# Altium PCB PCB.PcbDoc (part 2 of 2)
Units mil, origin at the board's own origin, x right, y up, seen from the top; angles counter-clockwise.
Board outline 4230 x 2520 mil, 4 copper layers (Top Layer, Int1 (GND), Int2 (PWR), Bottom Layer), stack 62.45 mil thick; 113 components, 91 nets, 361 pads, 344 vias.
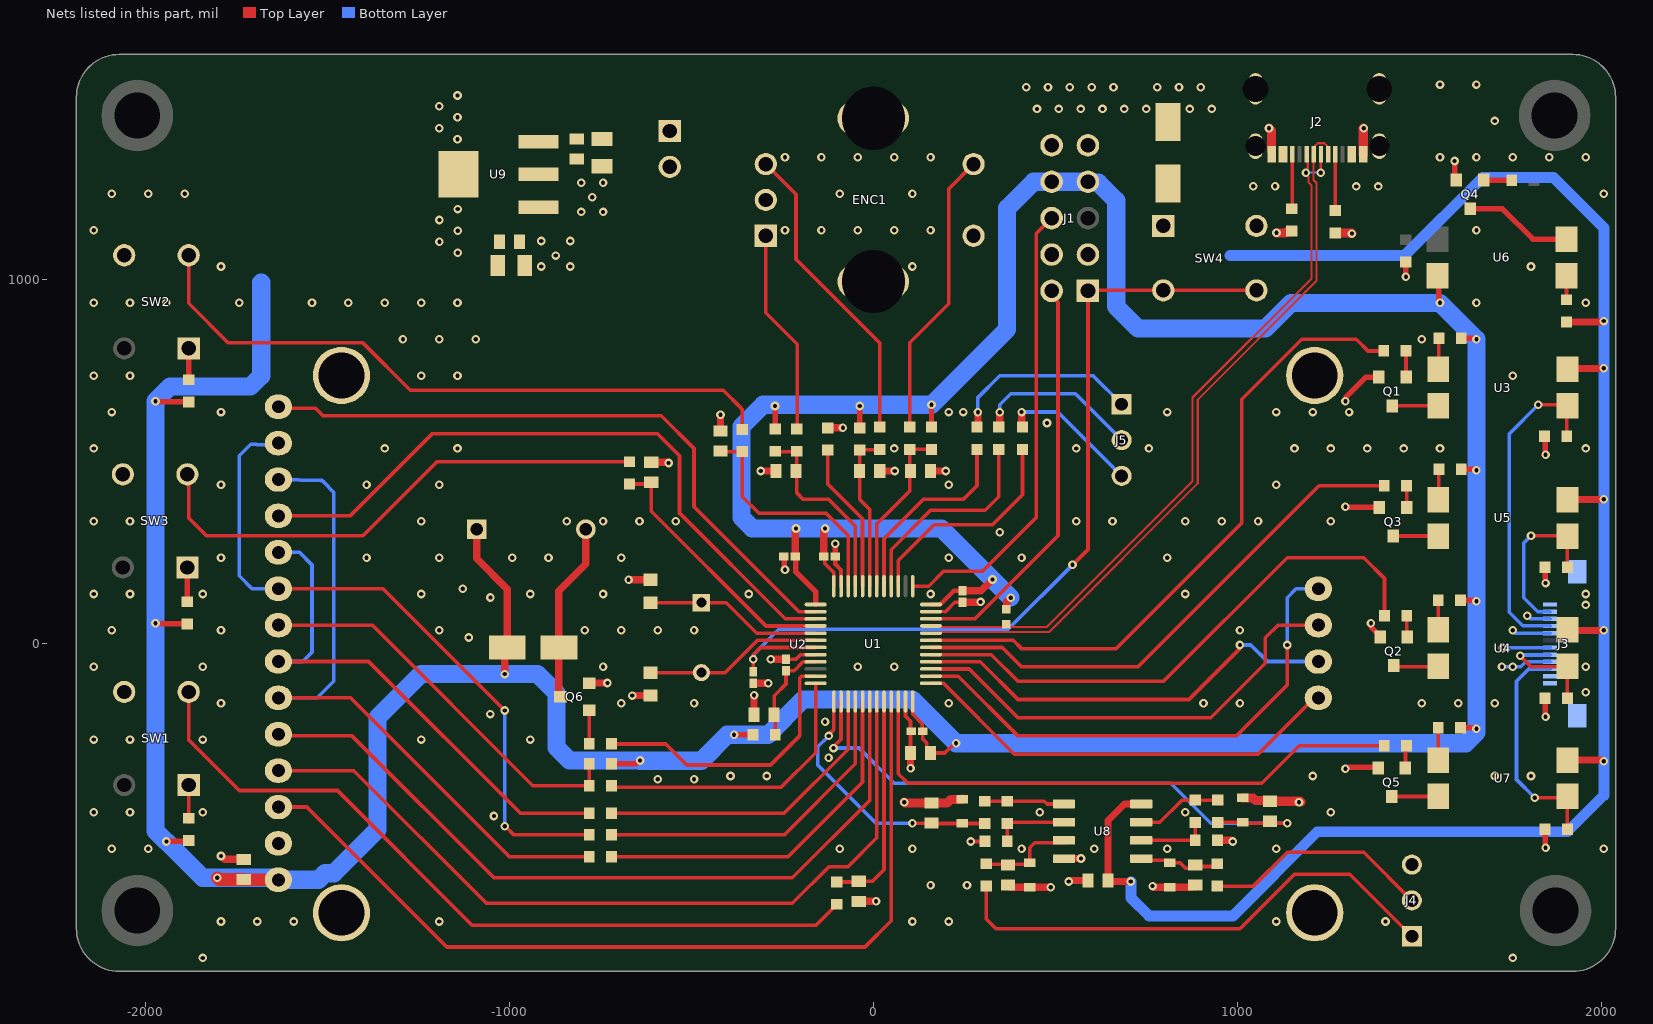
[diagram p4: the nets of this part, all layers, seen from the top]

## Via types
v1: diameter 23.62/23.62/23.62/23.62 (per signal layer), hole 11.81, Top Layer to Bottom Layer, tented both sides, 171 vias
v2: diameter 23.62, hole 11.81, Top Layer to Bottom Layer, tented both sides, 108 vias
v3: diameter 23.62, hole 11.81, Top Layer to Bottom Layer, 65 vias

## Nets (pads, with @x,y where several pads share a name; then routed paths per layer and width w, separated by ;. In a path a pad name is that pad's centre, name@x,y a point inside that pad or via, vN(x,y) a via of type N, cw(c..) or ccw(c..) an arc to the next point about the centre after c; other vN are vias at no path point) (continued)
3V3: C1.2 C2.2 C3.2 C4.2 C5.2 C11.2 C23.2 C24.2 D1.1 J1.7 J1.8 L1.1 R2.1 R3.1 R6.2 R10.2 R11.2 R14.2 R15.2 R19.2 R20.2 R21.2 R22.2 R30.2 R43.2 U1.1 U1.24 U1.36 U1.48 U2.1 U6.4 U9.2 U9.4 | length 13519.2
  Top Layer w10: C5.2@-135.81,240 -133,237.19 -133,220.03 -108.27,195.3 U1.48@-108.27,158.46 ; U1.24@108.27,-158.46 108.27,-193.76 134.54,-220.03 134.54,-238.72 C1.2@135.81,-240 135.81,-261.31 147.2,-272.7 147.2,-289.65 C2.2@160.53,-302.97 ; C2.2@157.56,-300 196.76,-300 223.79,-272.97 v2(227.47,-272.97)
  Top Layer w12: U1.36@158.46,108.27 183.9,108.27 221.44,145.81 C4.2@245,145.81
  Top Layer w15: v2(-1972.53,57.03) -1971.2,55.7 -1890.7,55.7 R11.2@-1887.65,52.65 ; v2(-1972.53,667.03) -1971.2,665.7 -1882.74,665.7 R10.2@-1881.42,664.38 ; v2(-1942.53,-542.97) -1941.35,-541.8 -1882.59,-541.8 R6.2@-1881.42,-540.62 ; R3.1@-719.38,-330 -652.61,-330 -643.18,-320.58 v2(-640.85,-320.58) ; v2(-382.53,-250) R2.1@-330.62,-250 ; R19.2@-270,589.87 v2@-270,650.62 ; v2@-214.19,315.37 v2(-212.53,317.03) ; C3.2@-212.53,241.94 -212.53,197.86 -158.46,143.8 U1.1@-158.46,108.27 ; v2@-135.81,311.41 -132.53,314.7 v2(-132.53,317.03) ; R14.2@-37.56,589.87 v2@-37.56,650.62 ; R15.2@160,593.31 v2@160,654.06 ; U6.4@1553.75,1007.03 1553.75,943.09 1557.47,939.36 v2(1557.47,937.03) ; R30.2@1613.75,-230 1652.17,-230 1655.14,-232.97 v2(1657.47,-232.97) ; R21.2@1613.75,120 1652.17,120 1655.14,117.03 v2(1657.47,117.03) ; R22.2@1613.75,480 1652.17,480 1655.14,477.03 v2(1657.47,477.03) ; R20.2@1615.62,840 1652.17,840 1655.14,837.03 v3(1657.47,837.03)
  Top Layer w20: L1.1@-1090,315 -1090,234.5 -1006,150.5 D1.1@-1006,-10 -1012.53,-16.53 v3(-1012.53,-82.97) ; C3.2@-214.19,240 v2@-214.19,315.37 ; C5.2@-135.81,240 v2@-135.81,311.41 ; C4.2@245.83,148.67 245.83,145.81 296.25,145.81 v2(327.47,177.03) ; R43.2@365,95 366.81,96.81 366.81,115.39 377.47,126.05 v2(377.47,127.03)
  Top Layer w35: v2(-1802.53,-642.97) -1797.82,-647.68 C11.2@-1730,-647.68 -1729.65,-648.03 -1635.22,-648.03 U2.1@-1634.87,-648.38
  Bottom Layer w50: v2(-1802.53,-642.97) -1842.53,-642.97 v2(-1942.53,-542.97) -1943.24,-542.97 -1972.53,-513.68 v2(-1972.53,57.03) v2(-1972.53,667.03) -1932.53,707.03 -1711.48,707.03 -1682.19,736.32 -1682.19,992.62 ; v2@-1798.92,-642.97 U2.1@-1634.87,-642.97 ; U2.1@-1634.87,-648.38 -1524.46,-648.38 -1506.38,-630.3 -1482.17,-630.3 -1362.53,-510.67 -1362.53,-202.97 -1242.53,-82.97 v3(-1012.53,-82.97) -922.53,-82.97 -870.76,-134.73 -870.76,-284.73 -834.92,-320.58 v2(-640.85,-320.58) ; v2@-640.26,-321.17 -472.7,-321.17 -401.53,-250 v2(-382.53,-250) -289.56,-250 -192.53,-152.97 107.47,-152.97 v2(227.47,-272.97) 1628.18,-272.97 1657.47,-243.68 v2(1657.47,-232.97) v2(1657.47,117.03) v2(1657.47,477.03) v3(1657.47,837.03) v2(1557.47,937.03) 1147.79,937.03 1077.79,867.03 727.47,867.03 667.47,927.03 667.47,1218.24 617.97,1267.74 592.26,1267.74 J1.7@590,1270 J1.8@490,1270 ; 147.47,657.03 -302.97,657.03 -362.53,597.47 -362.53,347.03 -332.53,317.03 v2(-212.53,317.03) v2(-132.53,317.03) 187.47,317.03 v2(327.47,177.03) v2(377.47,127.03) ; v2(160,657.03) 367.47,864.5 367.47,1197.03 440.33,1269.89 486.7,1269.89 J1.8@488.4,1271.6
  other v2: -270,653.59 -37.56,653.59 -1142.24,1074.88 -1192.24,1104.88 -1142.24,1134.88 -1192.24,1164.88 -1142.24,1194.88 -1142.53,1387.03 -1142.53,1447.03 -1192.53,1477.03 -1142.53,1507.03
  other v3: -1192.53,1417.03
3V3_VA: C6.2 C10.2 R2.2 U1.9 | length 282.7
  Top Layer w10: R2.2@-269.38,-250 -269.38,-198.06 C10.2@-272.44,-195 -272.44,-142.74 -240,-110.3 C6.2@-240,-73.6 -217.23,-73.6 -192.92,-49.29 -158.54,-49.29 U1.9@-158.46,-49.21
5V0: C22.2 C25.2 C26.2 D4.1 J1.9 J1.10 J6.1 R29.2 U3.4 U4.4 U5.4 U7.4 U8.8 U9.3 | length 5072.3
  Top Layer w10: U4.4@1907.43,38.53 U4.4@1908.93,37.03 ; U5.4@1907.43,396.37 U5.4@1908.1,397.03 ; U3.4@1907.43,754.2 U3.4@1910.26,757.03
  Top Layer w20: v2(707.47,-652.97) 648.09,-652.97 C22.2@645.12,-650 645.12,-485.32 690.44,-440 U8.8@736.3,-440 ; R29.2@1905,884.38 2003.84,884.38 2006.49,887.03 v2(2007.47,887.03) ; U7.4@1907.43,-319.31 v2@2003.82,-319.31 ; U5.4@1908.1,397.03 v2(2007.47,397.03) ; U4.4@1908.93,37.03 v2(2007.47,37.03) ; U3.4@1910.26,757.03 v2(2007.47,757.03)
  Bottom Layer w30: v2@708.21,-653.71 708.21,-698.09 758.21,-748.09 988.21,-748.09 1219.91,-516.38 1907.22,-516.38 2007.47,-416.13 v2(2007.47,-322.97) v2(2007.47,37.03) v2(2007.47,397.03) ; 979.88,1067.03 1459.92,1067.03 1674.8,1281.91 1868.92,1281.91 2008.21,1142.62 v2@2008.21,887.77 ; v2@2008.21,397.77 v2@2008.21,756.29 ; v2@2008.21,757.77 v2@2008.21,886.29
  other v3: 450,1470 510,1470 570,1470 630,1470 690,1470 750,1470 870,1470 930,1470 420,1530 480,1530 540,1530 600,1530 660,1530 780,1530 840,1530 900,1530
B1: C12.2 R8.2 U1.20 | length 605.8
  Top Layer w10: R8.2@-100,-654.38 -41.94,-654.38 C12.2@-40,-652.44 -2,-652.44 29.53,-620.91 U1.20@29.53,-158.46
B2: C13.2 R12.2 U1.46 | length 659
  Top Layer w10: C13.2@-420,529.93 -418.35,528.28 R12.2@-360,528.28 -360,404.5 -314.34,358.84 -130.08,358.84 -68.9,297.66 U1.46@-68.9,158.46
B3: C14.2 R13.2 U1.4 | length 723.5
  Top Layer w10: R13.2@-670,439.38 -614.61,439.38 C14.2@-610,443.99 -610,439.38 -610,364.5 -294.71,49.21 U1.4@-158.46,49.21
B4: C16.2 R15.1 R17.2 U1.42 | length 472.9
  Top Layer w10: U1.42@9.84,158.46 9.84,329.4 100.55,420.11 100.55,487.03 R17.2@100.55,534.38 R15.1@160,534.38
BLOWER: R25.2 U1.30 | length 1474.2
  Top Layer w10: U1.30@158.46,-9.84 354.35,-9.84 407.47,-62.97 727.47,-62.97 1225.11,434.67 1404.05,434.67 R25.2@1404.38,435
BLOWER_ISO: J3.2 R28.2 U5.3 | length 452.5
  Top Layer w10: v2(1807.47,297.03) U5.3@1907.43,297.03 ; R28.2@1907.43,210 U5.3@1907.43,296.37
  Bottom Layer w10: v2(1807.47,297.03) 1787.47,277.03 1787.47,127.03 1825.92,88.58 J3.2@1859.45,88.58
BUZZER: R7.2 U1.11 | length 779
  Top Layer w10: R7.2@-719.38,-275 -570.5,-275 -512.53,-332.97 -282.53,-332.97 -202.53,-252.97 -202.53,-94.44 -196.67,-88.58 U1.11@-158.46,-88.58
CH_A: C17.2 R18.2 R19.1 U1.45 | length 533
  Top Layer w10: R19.1@-263.88,528.28 -208.77,528.28 -209.91,527.13 -209.91,470.94 -209.91,414.42 -192.53,397.03 -122.53,397.03 -49.21,323.72 U1.45@-49.21,158.46
CH_B: C15.2 R14.1 R16.2 U1.43 | length 441.3
  Top Layer w10: U1.43@-9.84,158.46 -9.84,369.32 -37.56,397.03 -37.56,480 R14.1@-37.56,532.35 -36.54,533.36 16.54,533.36 R16.2@17.56,534.38
Display.CS: U1.21 U2.3 | length 2475.9
  Top Layer w10: U2.3@-1634.87,-448.38 -1557.11,-448.38 -1172.53,-832.97 -22.53,-832.97 49.21,-761.23 U1.21@49.21,-158.46
Display.MISO: R44.1 U1.16 | length 922.3
  Top Layer w10: R44.1@-719.38,-525 -244.56,-525 -49.21,-329.65 U1.16@-49.21,-158.46
Display.MOSI: R49.1 U1.17 | length 996.3
  Top Layer w10: R49.1@-719.38,-585 -234.56,-585 -29.53,-379.97 U1.17@-29.53,-158.46
Display.SCK: R48.1 U1.15 | length 828.6
  Top Layer w10: R48.1@-719.38,-465 -244.56,-465 -68.9,-289.34 U1.15@-68.9,-183.98
Display_Control.Back_Light: R4.1 U1.12 | length 792.3
  Top Layer w10: R4.1@-719.38,-390 -715.76,-393.62 -253.18,-393.62 -158.46,-298.91 U1.12@-158.46,-108.27
Display_Control.DC: U1.18 U2.5 | length 2148.4
  Top Layer w10: U2.5@-1634.87,-248.38 -1630.28,-252.97 -1432.53,-252.97 -1042.53,-642.97 -222.53,-642.97 -9.84,-430.28 U1.18@-9.84,-158.46
Display_Control.IQR: U1.2 U2.14 | length 1803.4
  Top Layer w10: U2.14@-1634.87,651.62 -1630.28,647.03 -1532.53,647.03 -1512.53,627.03 -582.53,627.03 -492.53,537.03 -492.53,376.99 -204.12,88.58 U1.2@-158.46,88.58
Display_Control.RST: U1.19 U2.4 | length 2244.9
  Top Layer w10: U2.4@-1634.87,-348.38 -1427.53,-348.38 -1062.95,-712.97 -222.53,-712.97 -122.53,-612.97 -70,-612.97 9.84,-533.13 U1.19@9.84,-158.46
GND_ISO: C1.1 C2.1 C3.1 C4.1 C5.1 C6.1 C7.1 C8.2 C9.2 C10.1 C11.1 C12.1 C13.1 C14.1 C15.1 C16.1 C17.1 C18.1 C19.1 C20.1 C21.1 C22.1 C23.1 C24.1 C25.1 C26.1 D2.2 D3.2 D5.2 D6.2 ENC1.1 ENC1.3 ENC1.4 ENC1.C J1.3 J1.4 J2.1 J2.2 J2.3 J2.4 J2.A1-B12 J2.B1-A12 J3.1 J3.3 J3.5 J3.7 J3.9 J3.11 J3.12 J3.M1 J3.M2 J4.3 J6.2 Q1.2 Q2.2 Q3.2 Q4.2 Q5.2 Q6.2 R1.1 R5.2 R9.2 R26.1 R27.1 R28.1 R33.1 R34.1 R38.1 R42.1 SW1.4 SW2.4 SW3.4 SW4.1 SW4.2 U1.8 U1.23 U1.35 U1.47 U2.2 U8.4 U9.1 | length 3304.3
  Top Layer w8: U1.35@158.46,88.58 198.58,88.58
  Top Layer w10: C6.1@-240,-41.98 -212.53,-41.98 -200.08,-29.53 U1.8@-158.46,-29.53 ; U1.23@88.58,-158.46 88.58,-199.11 102.44,-212.97 C2.1@102.44,-300 ; 198.58,88.58 224.19,114.19 C4.1@245,114.19 C4.1@245.41,114.59 ; v2(267.47,-542.97) R38.1@306.85,-542.97
  Top Layer w12: C5.1@-104.19,240 -104.19,218.69 -88.58,203.09 U1.47@-88.58,158.46
  Top Layer w15: C3.1@-245.81,240 -245.81,237.2 -245.28,236.67 -245.28,209.13 -242.53,206.37 v2(-242.53,204.04) ; C5.1@-104.19,240 v2(-104.19,275.22) ; v2(1297.47,-342.97) 1299.81,-342.97 1304.12,-338.66 1385.56,-338.66 Q5.2@1387.07,-340.17 ; v2(1297.47,377.03) 1298.44,376.07 1384.09,376.07 Q3.2@1387.07,379.04 ; v2(1297.47,667.03) 1299.12,668.68 1299.12,678.68 1353.39,732.94 Q1.2@1389.25,732.94 ; v2(1367.47,57.03) 1369.12,55.38 1369.12,44.81 1387.07,26.87 Q2.2@1387.07,21.7 ; R33.1@1463.31,1046.63 1463.72,1046.22 v2(1463.72,1008.84) ; Q4.2@1597.88,1277.44 v2@1597.88,1326.63 ; v2@1847.07,-559.59 R34.1@1847.07,-510.41 ; v2@1847.07,-199.59 R27.1@1847.07,-150.41 ; v3@1847.07,167.44 R28.1@1847.07,216.63 ; v2@1847.07,520.41 R26.1@1847.07,569.59
  Top Layer w20: v3(-1792.53,-582.97) -1791.55,-582.97 -1782.42,-592.1 C11.1@-1730.41,-592.1 ; Q6.2@-780.63,-107.6 v2(-730.63,-107.6) ; v2(-672.53,176.09) C8.2@-612.53,176.09 ; v2(-662.53,-142.03) C9.2@-612.53,-142.03 ; C14.1@-610,499.11 -565.59,499.11 -563.51,497.03 v2(-562.53,497.03) ; C13.1@-420,585.05 v2(-420,630) ; C7.1@-330,-108.27 v2(-288.49,-108.27) ; C10.1@-327.56,-195 v2(-327.56,-141.16) ; v2(-309.07,475) C17.1@-267.56,475 ; v2(-281.51,-41.98) C6.1@-240,-41.98 ; R1.1@-125,593.59 v2(-83.49,593.59) ; C12.1@-40,-707.56 v2(7.65,-707.56) ; C15.1@17.56,475 v2(59.07,475) ; v2(102.44,-341.51) C2.1@102.44,-300 ; C16.1@157.56,475 v2(199.07,475) ; C4.1@245.41,114.59 245.51,114.7 294.29,114.7 v2(294.8,115.2) ; C18.1@370,-662.56 375.91,-668.46 v2(487.47,-668.46) ; U8.4@525.71,-589.99 v3@570.44,-589.99 ; v3(537.47,-652.97) 538.45,-652.97 541.42,-650 C22.1@590,-650 ; v2(767.47,-665.62) 768.45,-665.62 771.3,-668.46 874.96,-668.46 875.51,-667.91 C21.1@887.7,-667.91 ; R42.1@948.99,-542.12 951.12,-540 983.52,-540 986.49,-542.97 v2(987.47,-542.97)
  Top Layer w25: v2(85,-435) 87.44,-437.44 202.56,-437.44 212.78,-427.22 244.31,-427.22 D5.2@245,-426.54 ; D6.2@1015,-423.07 1015.69,-423.76 1043.76,-423.76 1050,-430 1087.56,-430 C20.1@1090,-432.44 1172.44,-432.44 v3@1175,-435 ; v3(1087.47,1417.03) 1094.09,1410.41 J2.B1-A12@1094.09,1355.14 ; v3@1108.43,1129.16 1132.11,1129.16 1134.95,1132 1147.63,1132 R5.2@1150,1134.38 ; R9.2@1270,1129.38 1313.59,1129.38 v3(1315.38,1127.59) ; J2.A1-B12@1346.5,1345 1346.5,1416.05 v3(1347.47,1417.03)
  Bottom Layer w10: v2(1727.47,-62.97) 1779.24,-62.97 1793,-49.21 J3.9@1859.45,-49.21 ; v2(1729.97,-11.47) 1730.78,-10.66 1858.63,-10.66 J3.7@1859.45,-9.84 ; v2(1757.47,37.03) 1764.98,29.53 J3.5@1859.45,29.53 ; v3(1797.47,77.03) 1805.61,68.9 J3.3@1859.45,68.9
  other v1: -1842.53,-862.97 1757.47,-862.97 -1792.53,-762.97 -1692.53,-762.97 -1592.53,-762.97 -1192.53,-762.97 107.47,-762.97 207.47,-762.97 1107.47,-762.97 1407.47,-762.97 157.47,-662.97 257.47,-662.97 -2092.53,-562.97 -1992.53,-562.97 -92.53,-562.97 107.47,-562.97 407.47,-562.97 607.47,-562.97 807.47,-562.97 1107.47,-562.97 2007.47,-562.97 -2142.53,-462.97 -2042.53,-462.97 -1842.53,-462.97 457.47,-462.97 857.47,-462.97 1257.47,-462.97 -592.53,-371.81 -492.53,-371.81 -392.53,-362.97 -292.53,-362.97 1207.47,-362.97 1707.47,-362.97 1807.47,-362.97 -2142.53,-262.97 -2042.53,-262.97 -1842.53,-262.97 -1242.53,-262.97 -942.53,-262.97 -1792.53,-162.97 -692.53,-162.97 -492.53,-162.97 207.47,-162.97 907.47,-162.97 1007.47,-162.97 1507.47,-162.97 1607.47,-162.97 1707.47,-162.97 -2142.53,-62.97 -1842.53,-62.97 -742.53,-62.97 -42.53,-62.97 57.47,-62.97 1757.47,-62.97 1957.47,-62.97 -1112.09,17.47 -2092.53,37.03 -1792.53,37.03 -1192.53,37.03 -792.53,37.03 -692.53,37.03 -592.53,37.03 -492.53,37.03 1007.47,37.03 -1052.09,127.47 -2142.53,137.03 -2042.53,137.03 -1842.53,137.03 -1242.53,137.03 -942.53,137.03 -742.53,137.03 -342.53,137.03 157.47,137.03 857.47,137.03 1957.47,137.03 -1127.96,151.6 -1792.53,237.03 -1392.53,237.03 -1192.53,237.03 -992.53,237.03 -892.53,237.03 -692.53,237.03 207.47,237.03 407.47,237.03 807.47,237.03 -2142.53,337.03 -2042.53,337.03 -1242.53,337.03 -842.53,337.03 -742.53,337.03 -642.53,337.03 -542.53,337.03 557.47,337.03 657.47,337.03 857.47,337.03 957.47,337.03 1057.47,337.03 1257.47,337.03 -1792.53,437.03 -1392.53,437.03 -1192.53,437.03 207.47,437.03 1107.47,437.03 -2142.53,537.03 -1342.53,537.03 -1142.53,537.03 57.47,537.03 557.47,537.03 757.47,537.03 1157.47,537.03 1257.47,537.03 1357.47,537.03 1457.47,537.03 1557.47,537.03 1957.47,537.03 -2092.53,637.03 -1792.53,637.03 207.47,637.03 807.47,637.03 1107.47,637.03 1207.47,637.03 1307.47,637.03 -2142.53,737.03 -2042.53,737.03 -1242.53,737.03 -1142.53,737.03 1757.47,737.03 -1292.53,837.03 -1192.53,837.03 -1092.53,837.03 1507.47,837.03 -2142.53,937.03 -2042.53,937.03 -1942.53,937.03 -1742.53,937.03 -1542.53,937.03 -1442.53,937.03 -1342.53,937.03 -1242.53,937.03 -1142.53,937.03 1657.47,937.03 1957.47,937.03 -1792.53,1037.03 107.47,1037.03 1807.47,1037.03 -2142.53,1137.03 -242.53,1137.03 -142.53,1137.03 -42.53,1137.03 57.47,1137.03 157.47,1137.03 1657.47,1137.03 -2092.53,1237.03 -1992.53,1237.03 -1892.53,1237.03 -92.53,1237.03 107.47,1237.03 2007.47,1237.03 -242.53,1337.03 -142.53,1337.03 -42.53,1337.03 57.47,1337.03 157.47,1337.03 1557.47,1337.03 1657.47,1337.03 1757.47,1337.03 1857.47,1337.03 1957.47,1337.03 1707.47,1437.03 1557.47,1537.03 1657.47,1537.03
  other v2: 1847.47,-560 -1042.53,-472.97 -122.95,-312.55 -132.53,-214.26 1847.47,-200 -1052.53,-192.97 347.47,307.03 1847.47,520 477.47,607.03 247.47,637.03 -912.53,1037.03 -832.53,1037.03 -872.53,1067.03 -912.53,1107.03 -832.53,1107.03 -802.53,1187.03 -742.53,1187.03 -772.53,1227.03 -802.53,1267.03 -742.53,1267.03 1597.47,1327.03
  other v3: 570.67,-589.76 1170,-435 1957.47,-132.97 1957.47,107.03 1847.47,167.03 1108.07,1129.52
GUN_ADC: C20.2 D6.1 R40.2 U1.14 | length 1652.6
  Top Layer w10: v2(-109.34,-286.31) -109.34,-282.83 -88.58,-262.08 U1.14@-88.58,-158.46 ; R40.2@946.24,-490.62 1001.94,-490.62 D6.1@1005,-487.56 ; D6.1@1015,-490 1017.97,-492.97 v2(1137.47,-492.97)
  Bottom Layer w10: v2(-109.34,-286.31) -39.18,-286.31 57.47,-382.97 817.47,-382.97 927.47,-492.97 v2(1137.47,-492.97)
HEAT_GUN: R32.2 U1.22 | length 1587.2
  Top Layer w10: U1.22@68.9,-158.46 68.9,-356.54 95.33,-382.97 1067.47,-382.97 1170.44,-280 R32.2@1404.38,-280
HEAT_GUN_ISO: J3.10 R34.2 U7.3 | length 629
  Top Layer w10: v2(1817.47,-422.97) 1903.77,-422.97 U7.3@1907.43,-419.31 1907.43,-422.97 R34.2@1907.43,-510
  Bottom Layer w10: v2(1817.47,-422.97) 1767.47,-372.97 1767.47,-102.97 1801.54,-68.9 J3.10@1859.45,-68.9
IRON: R24.2 U1.29 | length 1547.5
  Top Layer w10: U1.29@158.46,-29.53 324.03,-29.53 397.47,-102.97 797.47,-102.97 1137.47,237.03 1347.47,237.03 1404.66,179.84 R24.2@1404.66,73.45
IRON_ADC: C19.2 D5.1 R36.2 U1.13 | length 719.1
  Top Layer w10: v2(-122.53,-252.97) -122.53,-249.28 -108.27,-235.02 U1.13@-108.27,-158.46 ; v2(107.47,-492.97) 159.59,-492.97 C19.2@160,-492.56 160.91,-493.46 D5.1@245,-493.46 245.06,-493.53 306.79,-493.53 R36.2@306.85,-493.59
  Bottom Layer w10: v2(-122.53,-252.97) -152.53,-282.97 -152.53,-332.97 7.47,-492.97 v2(107.47,-492.97)
IRON_ISO: J3.8 R27.2 U4.3 | length 314.3
  Top Layer w10: v2(1777.47,-32.97) 1807.47,-62.97 U4.3@1907.43,-62.97 ; R27.2@1907.43,-150 U4.3@1907.43,-61.47
  Bottom Layer w10: v2(1777.47,-32.97) 1780.01,-30.43 1858.54,-30.43 J3.8@1859.45,-29.53
MISO: R44.2 U2.9 U2.13 | length 1897.3
  Top Layer w10: U2.9@-1634.87,151.62 -1347.11,151.62 v2(-1012.53,-182.97) ; v2(-1012.53,-501.16) -1011.16,-501.16 -987.32,-525 R44.2@-780.62,-525 R44.2@-780,-525
  Bottom Layer w10: U2.9@-1634.87,151.62 -1707.11,151.62 -1742.53,187.03 -1742.53,517.03 -1710.72,548.84 -1694.34,548.84 -1692.53,547.03 -1639.46,547.03 U2.13@-1634.87,551.62 ; v2(-1012.53,-501.16) v2(-1012.53,-182.97)
MOSI: R49.2 U2.6 U2.12 | length 1892.3
  Top Layer w10: U2.6@-1634.87,-148.38 -1436.62,-148.38 -1000,-585 R49.2@-780.62,-585 R49.2@-780,-585
  Bottom Layer w10: U2.6@-1634.87,-148.38 -1527.94,-148.38 -1482.53,-102.97 -1482.53,412.09 -1482.53,416.11 -1511.06,445.96 -1513.98,448.88 -1517.99,448.97 U2.12@-1634.87,451.62
NetC8_1: C8.1 U1.5 Y1.1 | length 488.7
  Top Layer w10: C8.1@-612.53,113.09 Y1.1@-472.53,113.09 -404.2,113.09 -320.63,29.53 U1.5@-158.46,29.53
NetC9_1: C9.1 U1.6 Y1.2 | length 490.7
  Top Layer w10: C9.1@-612.53,-79.03 Y1.2@-472.53,-79.03 -407.85,-79.03 ; -407.53,-79.35 -318.33,9.84 U1.6@-158.46,9.84
NetC18_2: C18.2 D2.1 R35.2 U8.3 | length 275
  Top Layer w10: R35.2@310,-601.54 314.54,-606.08 D2.1@430,-606.08 ; D2.1@430,-601.54 430,-560.44 443.63,-546.81 526.71,-546.81 U8.3@533.53,-540
NetC21_2: C21.2 D3.1 R39.2 U8.5 | length 253.1
  Top Layer w10: U8.5@711.93,-590 759.53,-590 759.53,-594.53 804.06,-594.53 811.06,-601.54 843.04,-601.54 858.21,-616.71 880.12,-616.71 885,-611.83 934.71,-611.83 R39.2@945,-601.54
NetD1_2: D1.2 L1.2 Q6.3 | length 492.6
  Top Layer w20: Q6.3@-859.37,-145 -864,-140.37 -864,145.56 -790,219.56 L1.2@-790,315
NetD4_2: D4.2 J2.A4-B9 J2.B4-A9
  other v2: 1044.19,1257.37 1104.19,1257.37 1327.47,1257.03 1387.47,1257.03
NetENC1_2: ENC1.2 R17.1 | length 795.3
  Top Layer w10: R17.1@100.55,595.62 100.55,827.8 207.47,934.73 207.47,1250.31 ENC1.2@275.59,1318.43
NetENC1_A: ENC1.A R18.1 | length 567.9
  Top Layer w10: ENC1.A@-295.28,1121.57 -295.28,909.78 -208.77,823.27 R18.1@-208.77,589.53
NetENC1_B: ENC1.B R16.1 | length 852.4
  Top Layer w10: ENC1.B@-295.28,1318.43 -212.53,1235.68 -212.53,1057.03 17.56,826.95 R16.1@17.56,595.62
NetJ2_A5: J2.A5 R9.1 | length 154.5
  Top Layer w10: J2.A5@1269.72,1345 1269.72,1190.9 R9.1@1270,1190.62
NetJ2_B5: J2.B5 R5.1 | length 150
  Top Layer w10: R5.1@1150,1195.62 1151.61,1197.24 J2.B5@1151.61,1345
NetJ4_1: J4.1 R35.1 | length 1404
  Top Layer w10: R35.1@310,-665.62 310,-755.5 337.47,-782.97 1007.47,-782.97 1157.47,-632.97 1309.54,-632.97 J4.1@1480,-803.43
NetJ4_2: J4.2 R39.1 | length 628.1
  Top Layer w10: R39.1@945,-665.62 1044.82,-665.62 1137.47,-572.97 1347.97,-572.97 J4.2@1480,-705
NetJ5_1: J5.1 R47.2 | length 534.2
  Top Layer w20: R47.2@287.47,595.23 v2(287.47,636.74)
  Bottom Layer w10: v2(287.47,636.74) 287.47,677.03 347.47,737.03 603.83,737.03 J5.1@682.44,658.43
NetJ5_2: J5.2 R46.2 | length 461.8
  Top Layer w20: R46.2@347.47,595.23 v2(347.47,636.74)
  Bottom Layer w10: v2(347.47,636.74) 347.47,657.03 377.47,687.03 555.41,687.03 J5.2@682.44,560
NetJ5_3: J5.3 R45.2 | length 390.1
  Top Layer w20: v2(407.47,637.03) 408.17,636.34 408.17,597.46 R45.2@410,595.62
  Bottom Layer w10: v2(407.47,637.03) 506.98,637.03 J5.3@682.44,461.57
NetQ1_1: Q1.1 R23.1 | length 72.1
  Top Layer w10: Q1.1@1464.06,732.94 R23.1@1464.06,805
NetQ1_3: Q1.3 U3.2 | length 125.9
  Top Layer w10: Q1.3@1426.65,654.2 U3.2@1552.51,654.2
NetQ2_1: Q2.1 R24.1 | length 61.3
  Top Layer w10: Q2.1@1465.91,15.77 R24.1@1465.91,77.03
NetQ2_3: Q2.3 U4.2 | length 124.6
  Top Layer w10: Q2.3@1430,-59.37 1433.6,-62.97 1551.01,-62.97 U4.2@1552.51,-61.47
NetQ3_1: Q3.1 R25.1 | length 60
  Top Layer w10: R25.1@1465.62,435 1465.62,375.27 Q3.1@1465.79,375.11
NetQ3_3: Q3.3 U5.2 | length 124.1
  Top Layer w10: Q3.3@1428.39,296.37 U5.2@1552.51,296.37
NetQ4_1: Q4.1 R31.1 | length 77
  Top Layer w15: Q4.1@1677.4,1274.37 R31.1@1754.38,1274.37
NetQ4_3: Q4.3 U6.2 | length 299.6
  Top Layer w15: Q4.3@1640,1195.63 1728.87,1195.63 1812.46,1112.04 U6.2@1904.93,1112.04
NetQ5_1: Q5.1 R32.1 | length 75.9
  Top Layer w10: Q5.1@1462.4,-346.26 R32.1@1462.4,-270.41
NetQ5_3: Q5.3 U7.2 | length 129.9
  Top Layer w10: Q5.3@1425,-425 1430.69,-419.31 U7.2@1552.51,-419.31
NetQ6_1: Q6.1 R7.1 | length 94.7
  Top Layer w10: R7.1@-780.62,-275 -780.62,-187.39 Q6.1@-775.63,-182.4
NetR1_2: R1.2 U1.44 | length 413.4
  Top Layer w10: R1.2@-125,532.35 -125,439.5 -29.53,344.03 U1.44@-29.53,158.46
NetR3_2: R3.2 R4.2 U2.8 | length 1097.2
  Top Layer w10: U2.8@-1634.87,51.62 -1377.11,51.62 -935.5,-390 R4.2@-780.62,-390 R3.2@-780.62,-330
NetR6_1: R6.1 SW1.1 | length 102
  Top Layer w10: R6.1@-1881.42,-490 SW1.1@-1881.42,-387.95
NetR8_1: R8.1 SW1.2 | length 2148
  Top Layer w10: SW1.2@-1881.42,-132.05 -1881.42,-264.08 -1742.53,-402.97 -1472.53,-402.97 -1102.53,-772.97 -157.35,-772.97 R8.1@-100,-715.62
NetR10_1: R10.1 SW2.1 | length 86.4
  Top Layer w15: R10.1@-1881.42,725.62 SW2.1@-1881.42,812.05
NetR11_1: R11.1 SW3.1 | length 94.4
  Top Layer w15: R11.1@-1885,115.62 SW3.1@-1885,210
NetR12_1: R12.1 SW2.2 | length 1824.2
  Top Layer w10: SW2.2@-1881.42,1067.95 -1881.42,935.92 -1772.53,827.03 -1402.53,827.03 -1272.53,697.03 -412.53,697.03 -363.47,647.97 ; R12.1@-360,589.53 -360,644.5
NetR13_1: R13.1 SW3.2 | length 1438
  Top Layer w10: SW3.2@-1881.42,467.95 -1881.42,345.92 -1832.53,297.03 -1402.53,297.03 -1198.94,500.62 R13.1@-670,500.62
NetR20_1: R20.1 U3.1 | length 86.6
  Top Layer w10: U3.1@1552.51,754.2 1554.38,756.07 R20.1@1554.38,840
NetR21_1: R21.1 U4.1 | length 81.5
  Top Layer w10: U4.1@1552.51,38.53 R21.1@1552.51,120
NetR22_1: R22.1 U5.1 | length 84.4
  Top Layer w10: U5.1@1552.51,396.37 1554.38,398.24 R22.1@1554.38,480
NetR29_1: R29.1 U6.1 | length 66.4
  Top Layer w10: U6.1@1904.93,1012.04 1905,1011.98 R29.1@1905,945.62
NetR30_1: R30.1 U7.1 | length 89.3
  Top Layer w10: U7.1@1552.51,-319.31 R30.1@1552.51,-230
NetR36_1: R36.1 R37.2 U8.1 | length 239.3
  Top Layer w10: R36.1@306.85,-432.35 R37.2@368.1,-432.35 470.13,-432.35 477.79,-440 U8.1@542.97,-440
NetR37_1: R37.1 R38.2 U8.2 | length 188.9
  Top Layer w10: R38.2@368.1,-542.97 368.1,-492.35 370.44,-490 U8.2@505.35,-490
NetR40_1: R40.1 R41.2 U8.7 | length 265.9
  Top Layer w10: U8.7@720.44,-490 787.47,-490 848.1,-429.38 R41.2@885,-429.38 947.12,-429.38 956.99,-439.25 R40.1@956.99,-439.4
NetR41_1: R41.1 R42.2 U8.6 | length 198.2
  Top Layer w10: U8.6@736.16,-540 R42.2@885,-540 R41.1@885,-490.62
NRST: C7.2 J1.1 SW4.3 SW4.4 U1.7 | length 2452.4
  Top Layer w10: C7.2@-330,-76.65 v2(-330,-41.98) -330,-29.53 -310.31,-9.84 U1.7@-158.46,-9.84 ; v2(547.47,217.03) 590,259.56 J1.1@590,970 591.42,971.42 SW4.4@1052.95,971.42
  Bottom Layer w10: v2(-330,-41.98) -327.39,-39.37 -327.39,-27.84 -259.56,40 370.44,40 v2(547.47,217.03)
REED_SENSOR: R46.1 U1.40 | length 586.3
  Top Layer w10: U1.40@49.21,158.46 49.21,258.77 157.47,367.03 307.47,367.03 345,404.56 R46.1@345,534.38
SCK: R48.2 U2.7 U2.10 | length 1476.4
  Top Layer w10: U2.7@-1634.87,-48.38 -1387.11,-48.38 -970.5,-465 R48.2@-780.62,-465
  Bottom Layer w10: U2.7@-1634.87,-48.38 -1567.94,-48.38 -1542.53,-22.97 -1542.53,217.03 -1577.11,251.62 U2.10@-1634.87,251.62
SDcard.CS: U1.25 U2.18 | length 1209.2
  Top Layer w10: U1.25@158.46,-108.27 192.77,-108.27 387.47,-302.97 1057.47,-302.97 1211.9,-148.54 U2.18@1223.01,-148.54
SDcard.MISO: U1.27 U2.16 | length 1242.1
  Top Layer w10: U1.27@183.98,-68.98 263.48,-68.98 397.47,-202.97 927.47,-202.97 1077.47,-52.97 1077.47,17.03 1111.92,51.48 U2.16@1224.19,51.48
SDcard.MOSI: U1.28 U2.17 | length 1195.6
  Top Layer w10: U1.28@158.46,-49.21 293.72,-49.21 397.47,-152.97 867.47,-152.97 1004.87,-15.57 1004.87,-5.57 v2(1007.47,-2.97)
  Bottom Layer w10: v2(1007.47,-2.97) 1037.47,-2.97 1083.03,-48.52 U2.17@1224.19,-48.52
SDcard.SCK: U1.26 U2.15 | length 1441.9
  Top Layer w10: U1.26@158.46,-88.58 158.54,-88.66 233.17,-88.66 397.47,-252.97 997.47,-252.97 1137.47,-112.97 v2(1137.47,-2.97)
  Bottom Layer w10: v2(1137.47,-2.97) 1137.47,127.03 1161.92,151.48 U2.15@1224.19,151.48
SWDCLK: J1.6 U1.37 | length 1257.9
  Top Layer w10: U1.37@108.27,158.46 152.26,158.46 193.8,200 300.44,200 447.47,347.03 447.47,1127.47 J1.6@490,1170
SWDIO: J1.2 U1.34 | length 1123.7
  Top Layer w10: U1.34@158.46,68.9 279.34,68.9 507.47,297.03 507.47,938.51 490,955.98 J1.2@490,970
TILT_SENSOR: R45.1 U1.39 | length 611.2
  Top Layer w10: U1.39@68.9,158.46 68.9,228.9 167.03,327.03 327.47,327.03 410,409.56 R45.1@410,534.38
Touch.CS: U1.3 U2.11 | length 1872.5
  Top Layer w10: U2.11@-1634.87,351.62 -1437.94,351.62 -1212.53,577.03 -592.53,577.03 -532.53,517.03 -532.53,359.56 -241.87,68.9 U1.3@-158.46,68.9
USB_N: J2.A7 J2.B7 U1.32 | length 2036.6
  Top Layer w6.1: U1.32@158.46,29.53 185.07,29.53 187.86,32.32 482.7,32.32 891.57,441.19 891.57,671.13 1218.23,997.79 1218.23,1266.27 1209.98,1274.52 1209.98,1340.24 1207.95,1342.28 1213.52,1347.86 1213.52,1368.1 1221.11,1375.69 1239.59,1375.69 1247.18,1368.1 1247.18,1347.86 J2.B7@1250.04,1345
USB_P: J2.A6 J2.B6 R43.1 U1.33 | length 2020.9
  Top Layer w6.1: U1.33@158.46,49.21 185.07,49.21 187.86,46.42 476.86,46.42 877.47,447.03 877.47,676.97 1204.13,1003.63 1204.13,1260.43 1195.88,1268.68 1195.88,1283.34 1188.96,1290.26 1188.96,1299.74 1193.85,1304.62 1193.85,1321.84 1193.84,1342.14 J2.B6@1190.98,1345 ; v3(1229.85,1294.32) 1229.85,1344.49 J2.A6@1230.35,1345
  Bottom Layer w6.1: v3(1188.96,1295) 1229.16,1295 v3(1229.85,1294.32)
VACCUM_ON: R47.1 U1.41 | length 546.2
  Top Layer w10: U1.41@29.53,158.46 29.53,289.09 137.47,397.03 247.47,397.03 285,434.56 R47.1@285,534.38
VACCUM_PUMP: R23.2 U1.31 | length 1818.6
  Top Layer w10: U1.31@158.46,9.84 384.66,9.84 407.47,-12.97 667.47,-12.97 1012.47,332.03 1012.47,672.03 1177.47,837.03 1327.47,837.03 1359.5,805 R23.2@1403.12,805
VACCUM_PUMP_ISO: J3.4 R26.2 U3.3 | length 899
  Top Layer w10: v2@1830.08,654.43 v2(1827.47,657.03) 1904.6,657.03 1905.62,656.01 R26.2@1905.62,570
  Bottom Layer w10: v2(1827.47,657.03) 1747.47,577.03 1747.47,87.03 1784.39,50.12 1858.54,50.12 J3.4@1859.45,49.21
pads on no net: J1.5 J2.A8 J2.B8 MH1.1 MH2.1 MH3.1 MH4.1 SW1.3 SW2.3 SW3.3 U1.10
copper on no net:
  other v3: -2022.53,-812.97 1875,-812.97 -2077.53,-792.97 1820,-792.97 -1962.53,-787.97 1935,-787.97 -2102.53,-732.97 -1942.53,-732.97 1795,-732.97 1955,-732.97 -1962.53,-677.97 1935,-677.97 -2077.53,-672.97 1820,-672.97 -2022.53,-652.97 1875,-652.97 -2022.53,1372.03 1872.47,1372.03 -2077.53,1392.03 1817.47,1392.03 -1962.53,1397.03 1932.47,1397.03 -2102.53,1452.03 -1942.53,1452.03 1792.47,1452.03 1952.47,1452.03 -1962.53,1507.03 1932.47,1507.03 -2077.53,1512.03 1817.47,1512.03 -2022.53,1532.03 1872.47,1532.03

## Polygon pours and split planes (outlines as drawn)
GND_ISO on Top Layer "NONET_L-01_P-001" (solid, pour order 39): -972.53,1237.03 -992.53,1217.03 -992.53,1007.03 -982.53,997.03 -702.53,997.03 -692.53,1007.03 -692.53,1337.03 -707.61,1352.11 -837.45,1352.11 -842.53,1347.03 -842.53,1257.03 -862.53,1237.03
NetD4_2 on Top Layer "NETD4_2_L01_P022" (solid, remove dead copper, pour order 22): 997.47,1287.03 957.47,1327.03 767.47,1327.03 747.47,1307.03 747.47,1227.03 767.47,1207.03 947.47,1207.03 1105.13,1207.03 1137.47,1239.38 1137.47,1367.03 1114.01,1367.03 1114.01,1313.57 1087.47,1287.03
NetD4_2 on Top Layer "NETD4_2_L01_P023" (solid, pour order 23): 1327.47,1307.03 1327.47,1367.03 1302.02,1367.03 1302.02,1222.49 1317.47,1207.03 1397.47,1207.03 1417.47,1227.03 1417.47,1267.03 1397.47,1287.03 1347.47,1287.03
3V3 on Top Layer "NONET_L-01_P-001" (solid, pour order 37): -1632.53,997.03 -1742.53,997.03 -1762.53,1017.03 -1762.53,1577.03 -1742.53,1597.03 -1032.53,1597.03 -1012.53,1577.03 -1012.53,1347.03 -992.53,1327.03 -872.53,1327.03 -862.53,1317.03 -862.53,1267.03 -872.53,1257.03 -992.53,1257.03 -1012.53,1237.03 -1012.53,1007.03 -1022.53,997.03
5V0 on Top Layer "5V0_L01_P034" (solid, pour order 34): 607.47,1317.03 397.47,1317.03 337.47,1377.03 182.97,1377.03 150,1410 150,1470 120,1500 -120,1500 -120,1499.56 -152.53,1467.03 -152.53,1437.03 -182.53,1407.03 -332.97,1407.03 -372.97,1367.03 -852.53,1367.03 -872.53,1347.03 -972.53,1347.03 -992.53,1367.03 -992.53,1577.03 -972.53,1597.03 927.47,1597.03 957.47,1567.03 957.47,1387.03 927.44,1357 647.44,1357
GND_ISO on Int2 (PWR) "GND_ISO_L03_P014" (solid, remove dead copper, pour order 14): -2190,-781.89 -2190,1501.89 cw(c-2071.89,1501.89) -2071.89,1620 1921.89,1620 cw(c1921.89,1501.89) 2040,1501.89 2040,-781.89 cw(c1921.89,-781.89) 1921.89,-900 -2071.89,-900 cw(c-2071.89,-781.89)
GND_ISO on Int1 (GND) "GND_ISO_L02_P013" (solid, remove dead copper, pour order 13): -2190,-781.89 -2190,1501.89 cw(c-2071.89,1501.89) -2071.89,1620 1921.89,1620 cw(c1921.89,1501.89) 2040,1501.89 2040,-781.89 cw(c1921.89,-781.89) 1921.89,-900 -2071.89,-900 cw(c-2071.89,-781.89)
3V3 on Bottom Layer "NONET_L-01_P-001" (solid, pour order 38): -1742.53,997.03 -1712.53,967.03 -1652.53,967.03 -1622.53,997.03 -1022.53,997.03 -1012.53,1007.03 -1012.53,1257.03 -1012.53,1347.03 -1012.53,1577.03 -1032.53,1597.03 -1742.53,1597.03 -1762.53,1577.03 -1762.53,1017.03
5V0 on Bottom Layer "p" (solid, remove dead copper, pour order 26): 387.47,1577.03 387.47,1337.03 407.47,1317.03 727.47,1317.03 750,1294.5 750,1260 780,1230 810,1230 840,1200 840,1050 870,1020 990,1020 1020,1050 1020,1080 990,1110 990,1320 960,1350 960,1564.5 927.47,1597.03 407.47,1597.03
GND_ISO on Bottom Layer "GND_ISO_L04_P035" (solid, pour order 35): 1977.47,227.03 1957.47,247.03 1847.47,247.03 1827.47,227.03 1827.47,107.03 1837.47,97.03 1887.47,97.03 1897.47,87.03 1897.47,-72.97 1887.47,-82.97 1837.47,-82.97 1817.47,-102.97 1817.47,-232.97 1837.47,-252.97 1957.47,-252.97 1977.47,-232.97
GND_ISO on Bottom Layer "GND_ISO_L04_P036" (solid, pour order 36): 1967.47,103.04 1831.46,103.04 1827.47,107.03 1827.47,227.03 1847.47,247.03 1947.47,247.03 1967.47,227.03
NetD4_2 on Bottom Layer "NETD4_2_L04_P033" (solid, pour order 33): 1321.48,1357.03 1321.48,1313.03 1347.47,1287.03 1397.47,1287.03 1417.47,1267.03 1417.47,1227.03 1397.47,1207.03 1057.47,1207.03 1037.47,1207.03 1017.47,1227.03 1017.47,1267.03 1037.47,1287.03 1087.47,1287.03 1107.47,1307.03 1107.47,1357.03

## Silkscreen, mask and mechanical layers (free items; w line width, h text height)
Top Overlay:
  lines w7.87: -447.53,1357.03 -367.53,1357.03 ; 397.47,-62.97 817.47,-62.97 ; 397.47,57.03 607.47,57.03 817.47,57.03 ; 397.47,117.03 607.47,117.03 817.47,117.03 ; 847.47,507.03 1057.47,507.03 ; 847.47,607.03 1057.47,607.03 ; 1587.47,-752.97 1737.47,-752.97 ; 1587.47,-652.97 1737.47,-652.97 ; 397.47,177.03 397.47,-122.97 607.47,-122.97 ; 397.47,177.03 607.47,177.03 ; 397.47,177.03 397.47,-2.97 607.47,-2.97 ; 607.47,-122.97 607.47,177.03 ; 607.47,-122.97 607.47,177.03 ; 607.47,-122.97 817.47,-122.97 817.47,177.03 ; 607.47,-2.97 607.47,177.03 ; 607.47,-2.97 607.47,177.03 ; 607.47,-2.97 817.47,-2.97 817.47,177.03 ; 607.47,177.03 817.47,177.03 ; -447.53,1217.03 -447.53,1497.03 -367.53,1497.03 -367.53,1217.03 -447.53,1217.03 ; 847.47,417.03 847.47,697.03 1057.47,697.03 1057.47,417.03 847.47,417.03 ; 1587.47,-842.97 1737.47,-842.97 1737.47,-562.97 1587.47,-562.97 1587.47,-842.97
  lines w10: 477.47,647.03 497.47,667.03 ; 497.47,197.03 497.47,667.03 ; 517.47,647.03 497.47,667.03 ; 827.47,827.03 827.47,907.03 837.47,917.03 847.18,917.03 1017.47,917.03 1027.47,907.03 1027.47,822.89 1021.62,817.03 837.47,817.03 827.47,827.03 ; 1477.47,1417.03 1487.47,1407.03 1671.62,1407.03 1677.47,1412.89 1677.47,1497.03 1667.47,1507.03 1497.18,1507.03 1487.47,1507.03 1477.47,1497.03 1477.47,1417.03
  text "USB" at 1479.97,1407.03 h100
  text "VCC" at -392.53,1392.03 h30 r90
  text "GND" at -392.53,1247.03 h30 r90
  text "RST" at 829.97,817.03 h100
  text "Vaccum" at 867.47,632.03 h30
  text "Mag" at 912.47,542.03 h30
  text "Tilt" at 912.47,442.03 h30
  text "5V" at 477.46,132.03 h30
  text "5V" at 687.46,132.03 h30
  text "3V3" at 462.46,72.03 h30
  text "3V3" at 672.46,72.03 h30
  text "SWCLK" at 432.47,12.03 h30
  text "NC" at 687.46,12.03 h30
  text "GND" at 462.46,-47.97 h30
  text "GND" at 672.46,-47.97 h30
  text "SWDIO" at 434.97,-107.97 h30
  text "RST" at 672.46,-107.97 h30
  text "GND" at 1622.47,-627.97 h30
  text "GUN" at 1622.47,-717.97 h30
  text "IRON" at 1612.47,-817.97 h30
Bottom Overlay:
  lines w10: -2072.53,-72.97 -2062.53,-82.97 -1892.24,-82.97 -1882.53,-82.97 -1872.53,-72.97 -1872.53,7.03 -1882.53,17.03 -2066.67,17.03 -2072.53,11.17 -2072.53,-72.97 ; -2072.53,527.03 -2072.53,611.17 -2066.67,617.03 -1882.53,617.03 -1872.53,607.03 -1872.53,527.03 -1882.53,517.03 -1892.24,517.03 -2062.53,517.03 -2072.53,527.03 ; -2072.53,1127.03 -2062.53,1117.03 -1892.24,1117.03 -1882.53,1117.03 -1872.53,1127.03 -1872.53,1207.03 -1882.53,1217.03 -2066.67,1217.03 -2072.53,1211.17 -2072.53,1127.03 ; 1477.47,1417.03 1487.47,1407.03 1497.18,1407.03 1667.47,1407.03 1677.47,1417.03 1677.47,1501.17 1671.62,1507.03 1487.47,1507.03 1477.47,1497.03 1477.47,1417.03
  text "USB" at 1479.97,1507.03 h100 r180
  text "M1" at -2070.03,1217.03 h100 r180
  text "Control Board V0.1" at 1537.47,867.03 h60 r90
  text "Soldering Station" at 1437.48,857.03 h60 r90
  text "M2" at -2070.03,617.03 h100 r180
  text "M3" at -2070.03,17.03 h100 r180
Mechanical 1:
  the board outline again, w10

## Text inside footprints (layer, text, board x,y; h text height)
U2: Top Overlay "SD_SCK" at 982.47,137.03 h30; Top Overlay "SD_MISO" at 962.47,37.03 h30; Top Overlay "SD_CS" at 1012.47,-162.97 h30; Top Overlay "T_DO" at -1557.53,537.03 h30; Top Overlay "LED" at -1557.53,32.03 h30; Top Overlay "SD_MOSI" at 962.47,-62.97 h30; Top Overlay "SCK" at -1557.53,-57.97 h30; Top Overlay "DC" at -1557.53,-267.97 h30; Top Overlay "RST" at -1557.53,-367.97 h30; Top Overlay "T_IRQ" at -1567.53,617.03 h30; Top Overlay "T_DIN" at -1567.53,437.03 h30; Top Overlay "SDO(MISO)" at -1567.53,132.03 h30; Top Overlay "SDI(MOSI)" at -1557.53,-157.97 h30; Top Overlay "T_CS" at -1567.53,337.03 h30; Top Overlay "T_CLK" at -1567.53,237.03 h30; Top Overlay "CS" at -1567.53,-467.97 h30; Top Overlay "GND" at -1567.53,-557.97 h30; Top Overlay "VCC" at -1567.53,-647.97 h30